# EAGLE board throttleControll (EAGLE 9.6.2)
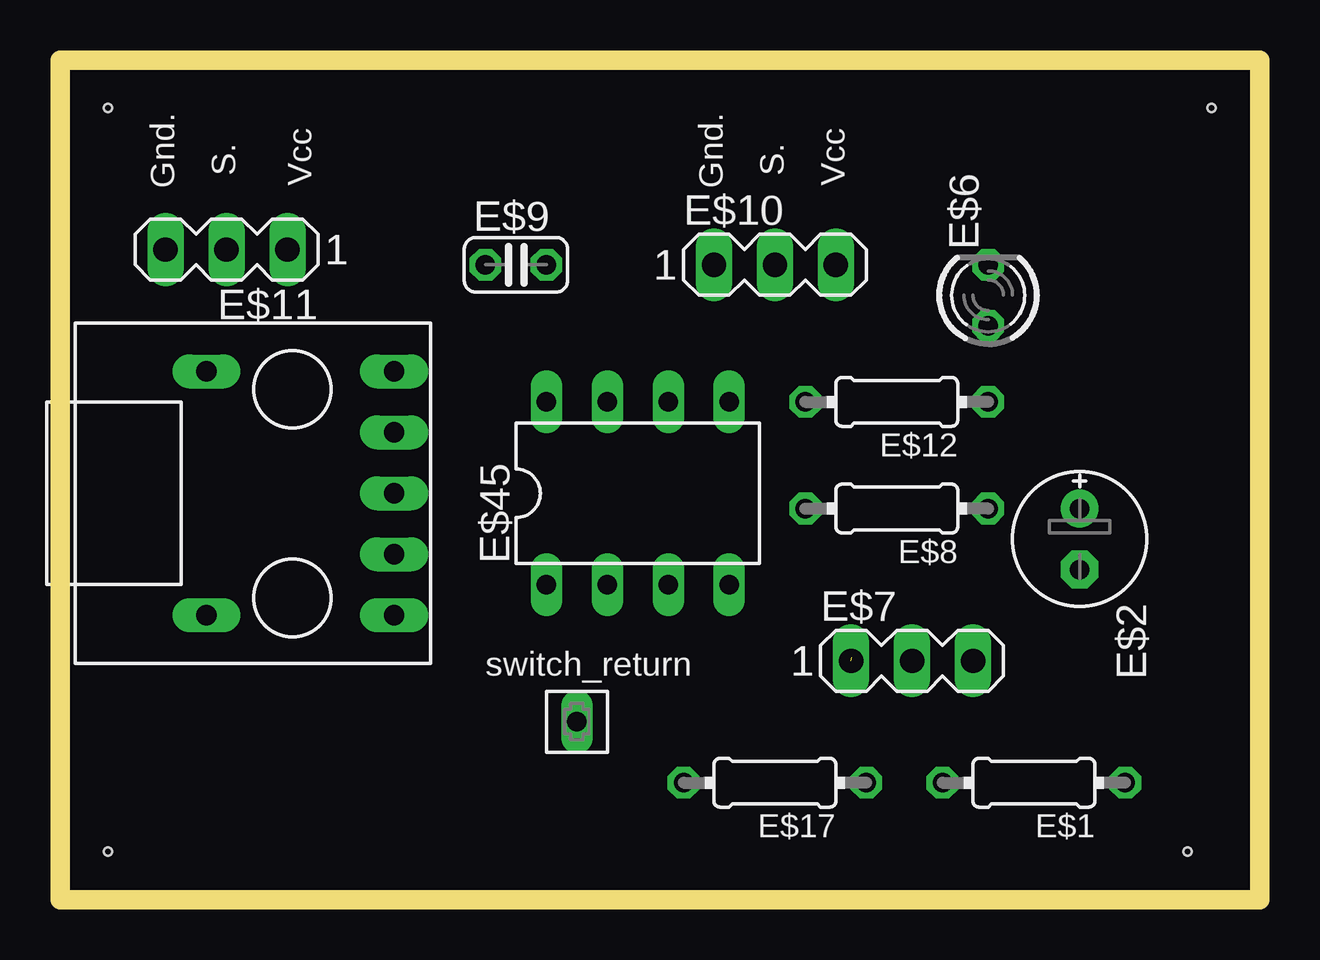
[diagram p0: board, top side]
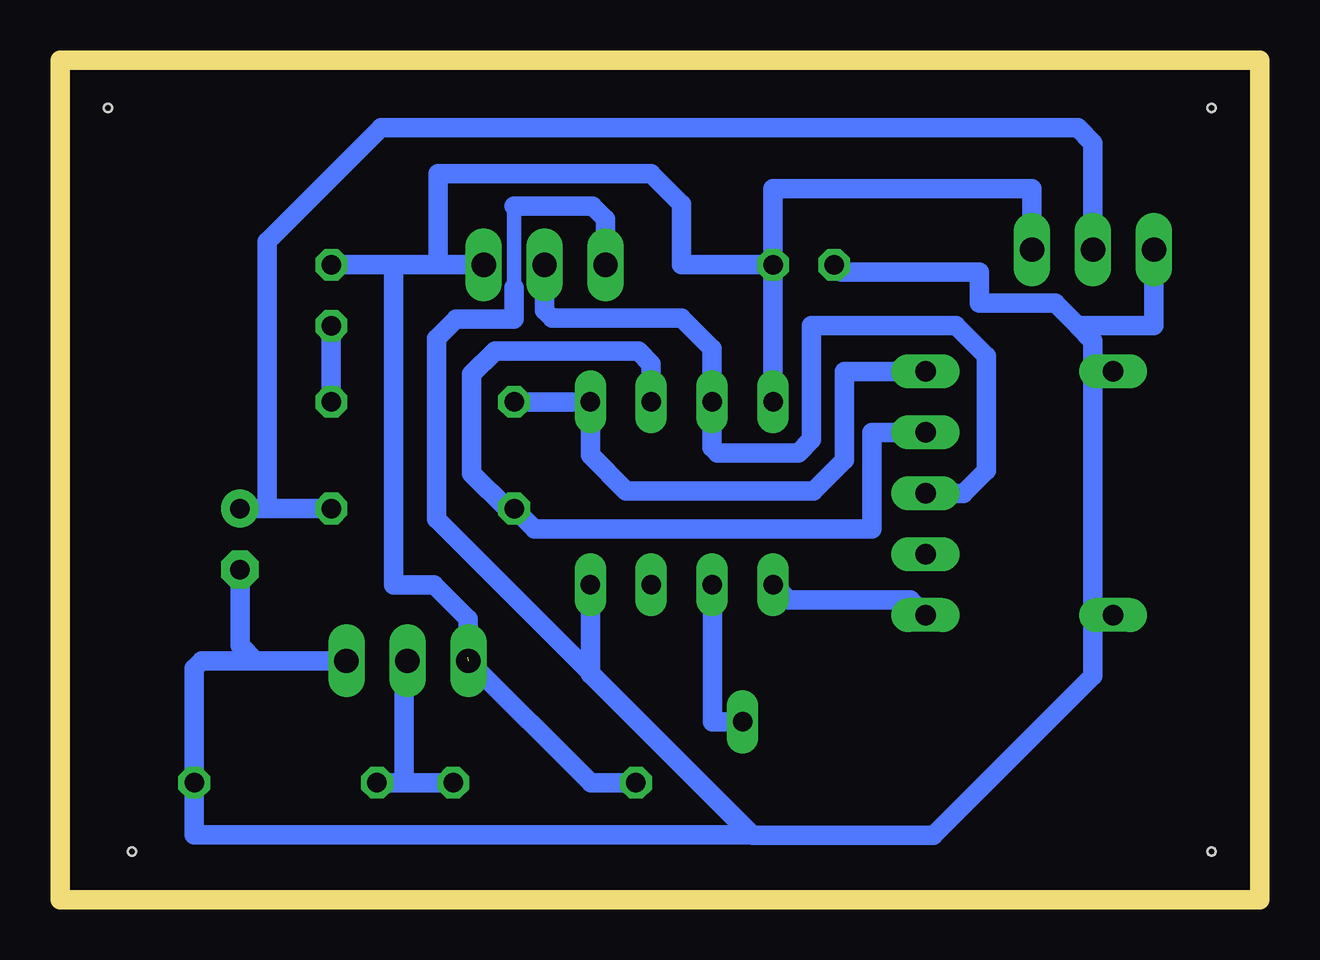
[diagram p1: board, bottom side, seen from below]

Size 50 x 35 mm. Coordinates in mm from the lower left corner, seen from the top.
Outline: 0,35 0,0 50,0 50,35 0,35
Copper layers (1*16): Top 0.035mm / dielectric 1.5mm / Bottom 0.035mm
Design rules "default": minimum track width 10mil, minimum drill 24mil, track to track 8mil, track to pad 8mil, pad to pad 8mil, via to via 8mil, smd to smd 8mil, copper to edge 40mil, drill to drill 8mil, minimum pad ring 10mil, minimum via ring 8mil, stop-mask expansion 4mil, vias tented up to drill 0mil, thermal gap 10mil
Holes 0.35 mm at 2,33 48,33 2,2 47,2

## Footprints (pad centres in the part's own frame; a part is rotated, then mirrored left to right if it is on the bottom)
0204/7 = drill 0.813 octagon: 1 -3.81,0; 2 3.81,0
E2,5-6E = drill 0.813 pad 1.575: + -1.27,0 | drill 0.813 pad 1.575 octagon: - 1.27,0
MA05-1 = drill 1.016 long: 1 -5.08,0; 2 -2.54,0; 3 0,0; 4 2.54,0; 5 5.08,0
TL1105 = drill 1 pad 1.676: 1 -2.25,3.25; 2 2.25,3.25; 3 -2.25,-3.25; 4 2.25,-3.25
USB-MICRO-PCB = drill 0.85 pad 1.422 long: P$1 -5.08,6.35; P$2 -2.54,6.35; P$3 0,6.35; P$4 2.54,6.35; P$5 5.08,6.35; P$6 -5.08,-1.47; P$7 5.08,-1.47
LED3MM = drill 0.813 octagon: A -1.27,0; K 1.27,0
MA03-1 = drill 1.016 long: 1 -2.54,0; 2 0,0; 3 2.54,0
C025-024X044 = drill 0.813 octagon: 1 -1.27,0; 2 1.27,0
FE01-1 = drill 0.813 long: 1 -1.27,0
TO92- = drill 0.813 long: 1 2.54,0; 2 0,0; 3 -2.54,0
1X01/90 = drill 1.016 long: 1 -1.27,-3.81
E5-8,5 = drill 1.016 pad 2.54: + -2.54,0 | drill 1.016 pad 2.54 octagon: - 2.54,0
MA04-1 = drill 1.016 long: 1 -3.81,0; 2 -1.27,0; 3 1.27,0; 4 3.81,0
MA06-1 = drill 1.016 long: 1 -6.35,0; 2 -3.81,0; 3 -1.27,0; 4 1.27,0; 5 3.81,0; 6 6.35,0
W237-132 = drill 1.194 long: 1 -2.54,-0.635; 2 2.54,-0.635
RS-2,5 = drill 0.813 pad 1.6 octagon: 1 -1.27,0; 2 1.27,0
2X02/90 = drill 1.016 octagon: 1 -1.27,-6.35; 2 -1.27,-3.81; 3 1.27,-6.35; 4 1.27,-3.81
DIL08 = drill 0.813 long: 1 -3.81,-3.81; 2 -1.27,-3.81; 3 1.27,-3.81; 4 3.81,-3.81; 5 3.81,3.81; 6 1.27,3.81; 7 -1.27,3.81; 8 -3.81,3.81

## Placement (x,y rotation side)
E$1  10k  [0204/7]  40.59,4.87 180 top
E$2  10uF  [E2,5-6E]  42.5,15.03 270 top
E$3  [MA05-1]  116.84,-1.89 270 top  (outside the outline)
E$4  [TL1105]  105.78,-18.25 90 top  (outside the outline)
E$5  [USB-MICRO-PCB]  7.58,16.94 270 top
E$6  Led  [LED3MM]  38.69,25.19 90 top
E$7  switch  [MA03-1]  35.52,9.95 0 top
E$8  5k  [0204/7]  34.88,16.3 180 top
E$9  1uF  [C025-024X044]  19,26.46 0 top
E$10  throttle  [MA03-1]  29.8,26.46 0 top
E$11  hub  [MA03-1]  6.94,27.09 180 top
E$12  220  [0204/7]  34.88,20.74 180 top
E$13  [FE01-1]  22.82,7.41 0 top
E$17  19k  [0204/7]  29.8,4.87 180 top
E$18  [TO92-]  106.05,31.77 90 top  (outside the outline)
E$22  [1X01/90]  109.86,4.47 180 top  (outside the outline)
E$23  [E5-8,5]  106.05,-7.6 270 top  (outside the outline)
E$26  [MA04-1]  115.57,-17.76 90 top  (outside the outline)
E$28  [MA06-1]  103.93,6.79 90 top  (outside the outline)
E$29  [W237-132]  117.47,30.18 270 top  (outside the outline)
E$30  [RS-2,5]  113.03,17.8 90 top  (outside the outline)
E$31  [2X02/90]  107.51,19.41 180 top  (outside the outline)
E$35  [MA04-1]  111.12,-27.29 90 top  (outside the outline)
E$45  [DIL08]  24.09,16.94 0 top

## Library data of the parts
E$1 E$8 E$12 E$17 = eagle-ltspice
E$2 E$9 = rcl
E$3 E$7 E$10 E$11 E$26 E$28 E$35 = con-lstb
E$4 = switch
E$5 = LSGPackages
E$6 = led
E$13 = con-lsta2
E$18 = transistor-fet
E$22 E$31 = pinhead
E$23 = ref-packages-longpad
E$29 = con-wago-508
E$30 = discrete
E$45 = 74xx-us

## Nets
MOSI: E$5.P$1 E$12.2 E$45.5
S$2: E$6.K E$7.1 E$9.2 E$10.3 E$11.1 E$17.2 E$45.8
S$3: E$1.2 E$7.2 E$17.1
S$4: E$1.1 E$2.- E$5.P$6 E$7.3 E$9.1 E$10.1 E$11.3 E$45.4
S$5: E$2.+ E$8.1 E$11.2
S$7: E$6.A E$12.1
S$9: E$5.P$3 E$10.2 E$45.7
S$11: E$5.P$2 E$8.2 E$45.6
S$12: E$5.P$5 E$45.1
S$13: E$13.1 E$45.2

## Tracks (layer width: path | path; a pad name or v marks a point on that pad's centre or on a via)
MOSI
  Bottom 0.813: E$12.2 E$45.5 27.89,18.52 26.41,17.03 18.59,17.03 17.3,18.32 17.3,22.02 E$5.P$1
S$2  (1 unrouted)
  Bottom 0.813: E$9.2 E$45.8 | E$9.2 20.27,29.63 9.48,29.63 E$11.1 | E$10.3 34.24,26.46 | 34.24,26.46 36.1,26.46 | 36.1,26.46 E$6.K | E$17.2 27.86,4.87 E$7.1 | 36.1,26.46 36.1,13.11 34.41,13.11 33,11.7 33,10.1 | E$9.2 24.09,26.46 24.09,29 25.36,30.27 34.24,30.27 34.24,26.46
S$3
  Bottom 0.813: 35.65,4.87 E$17.1 | 35.65,4.87 35.65,9.95 E$7.2 | 35.65,4.87 E$1.2
S$4
  Bottom 0.61: 31.07,25.51 31.07,28.9
  Bottom 0.813: E$2.- 42.5,10.59 41.87,9.95 | E$7.3 41.87,9.95 | 41.87,9.95 44.09,9.95 44.41,9.63 E$1.1 44.41,2.7 21.2,2.7 27.89,9.4 E$45.4 27.89,9.45 | E$9.1 17.43,26.16 11.69,26.16 11.69,24.85 8.51,24.85 7.58,23.92 | 6.94,22.02 6.94,23.28 7.58,23.92 | 27.89,9.45 21.11,2.67 13.59,2.67 6.94,9.31 6.94,22.02 | 6.94,22.02 E$5.P$6 | 7.58,23.92 4.4,23.92 E$11.3 | 31.07,28.9 27.8,28.9 27.26,28.37 E$10.1 | 31.07,25.51 31.07,24.2 33.5,24.2 34.31,23.39 34.31,15.87 27.89,9.45
S$5
  Bottom 0.813: E$2.+ 41.36,16.3 | 41.36,16.3 E$8.1 | 41.36,16.3 41.36,27.43 36.62,32.17 7.58,32.17 6.94,31.54 E$11.2
S$7
  Bottom 0.813: E$6.A E$12.1
S$9
  Bottom 0.813: E$10.2 29.8,24.55 29.48,24.24 24.09,24.24 22.82,22.97 E$45.7 22.82,18.84 22.6,18.62 19.22,18.62 18.67,19.17 18.67,23.92 12.65,23.92 11.38,22.65 11.38,17.89 12.34,16.94 E$5.P$3
S$11
  Bottom 0.813: E$45.6 25.36,22.33 25.89,22.87 31.87,22.87 32.84,21.9 32.84,17.77 31.37,16.3 E$8.2 30.22,15.45 16.15,15.45 16.15,19.48 E$5.P$2
S$12
  Bottom 0.813: E$45.1 19.64,12.49 14.56,12.49 E$5.P$5
S$13
  Bottom 0.813: E$13.1 22.8,7.41 22.8,13.11 E$45.2

## Text on the board
tPlace: Gnd. | Gnd. | S. | Vcc | S. | Vcc | switch_return